# Altium PCB CYT1001AG.PcbDoc
Units mm, origin at the board's own origin, x right, y up, seen from the top; angles counter-clockwise.
Board outline 40 x 40 mm, 2 copper layers (Top Layer, Bottom Layer); 19 components, 1 nets, 55 pads, 0 vias.
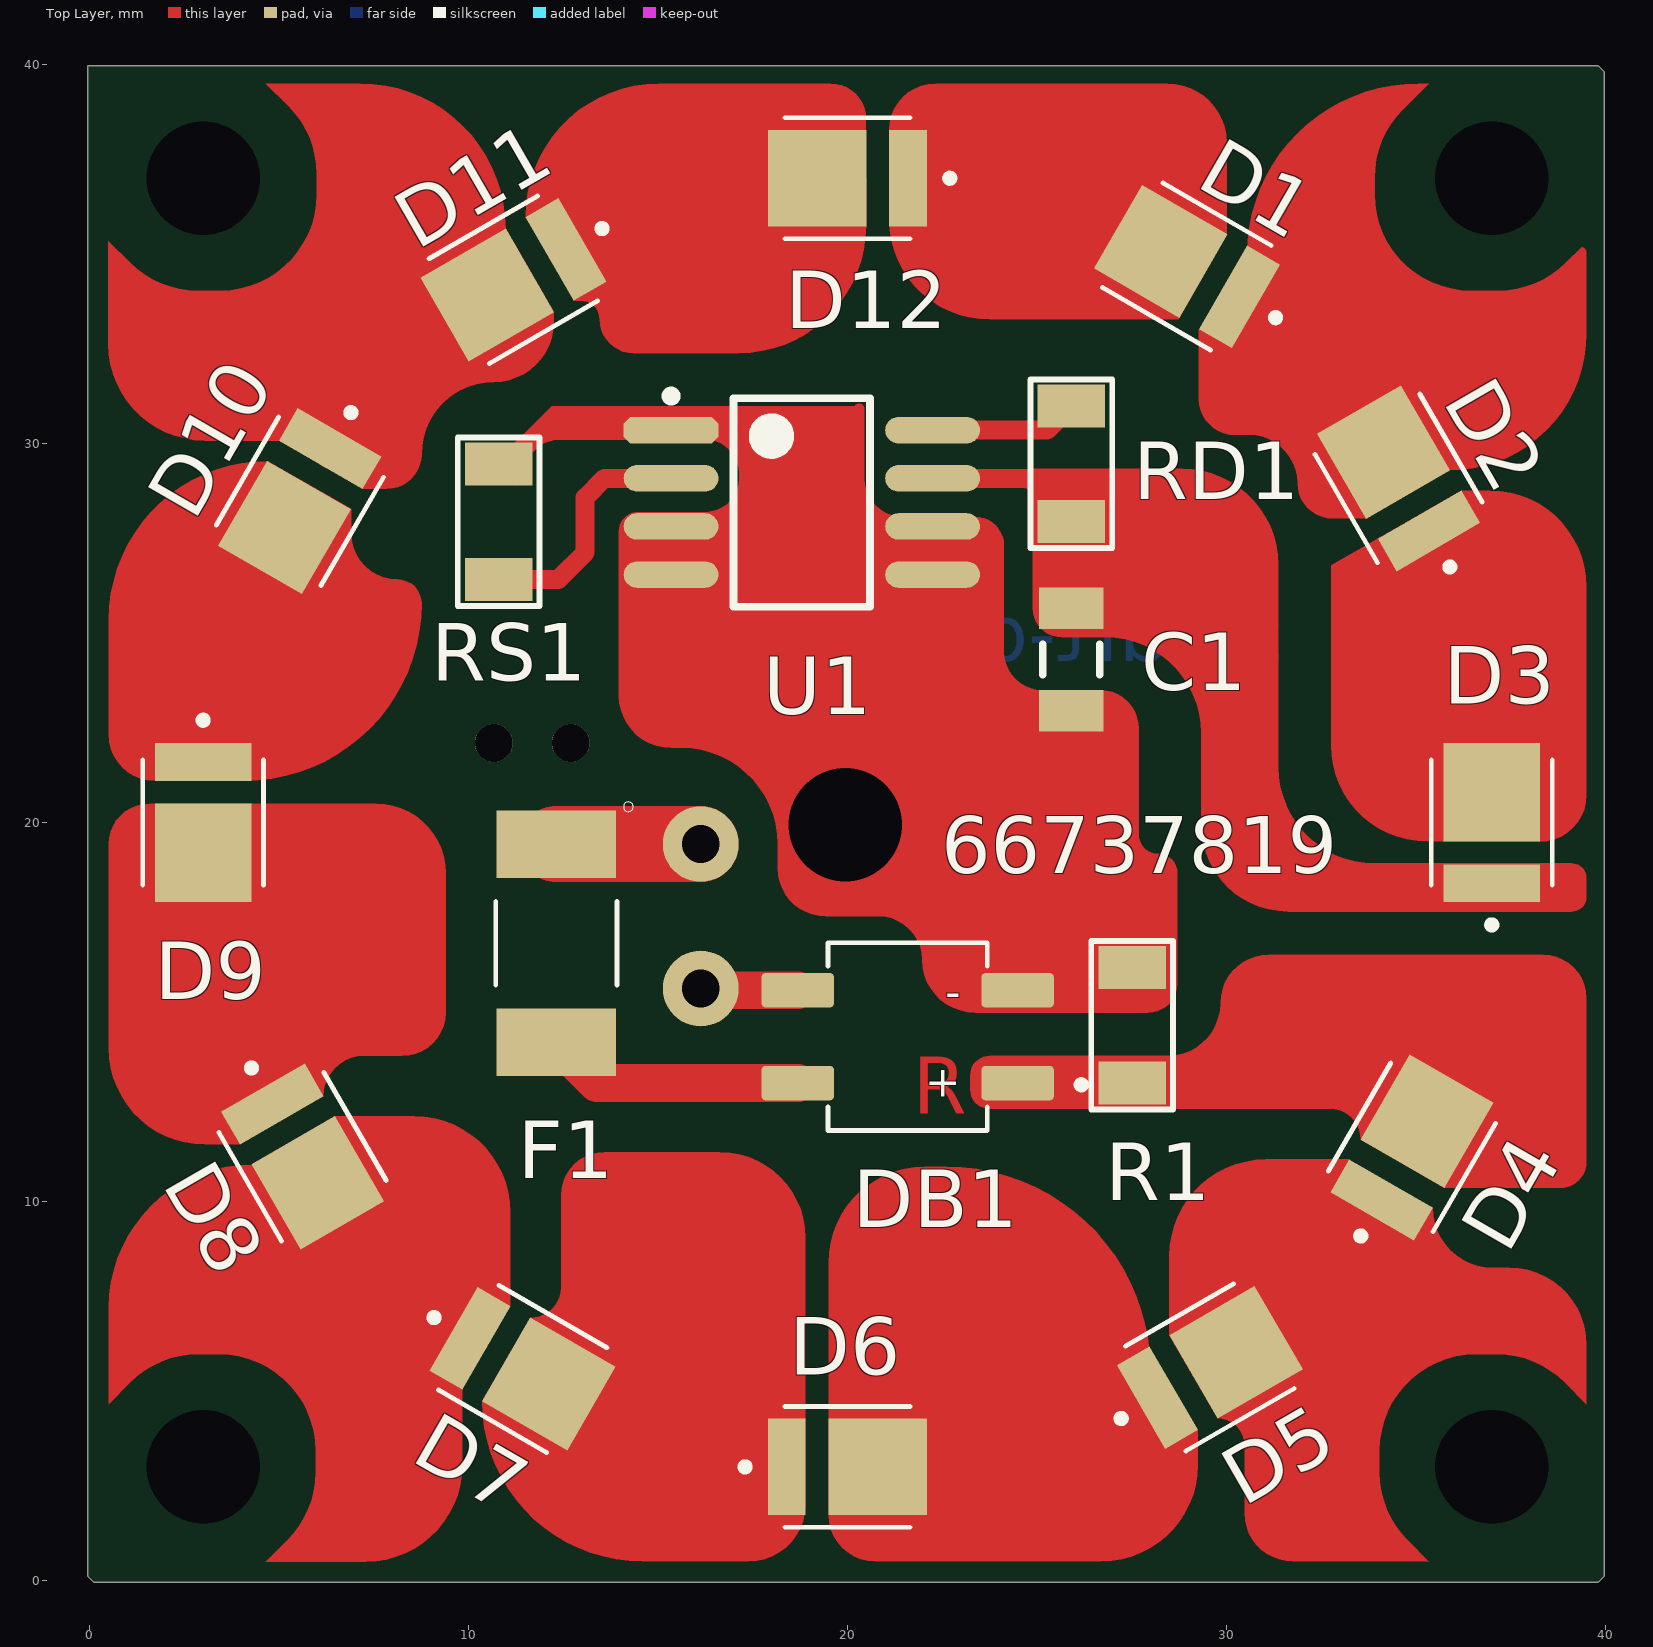
[diagram p0: Top Layer view]
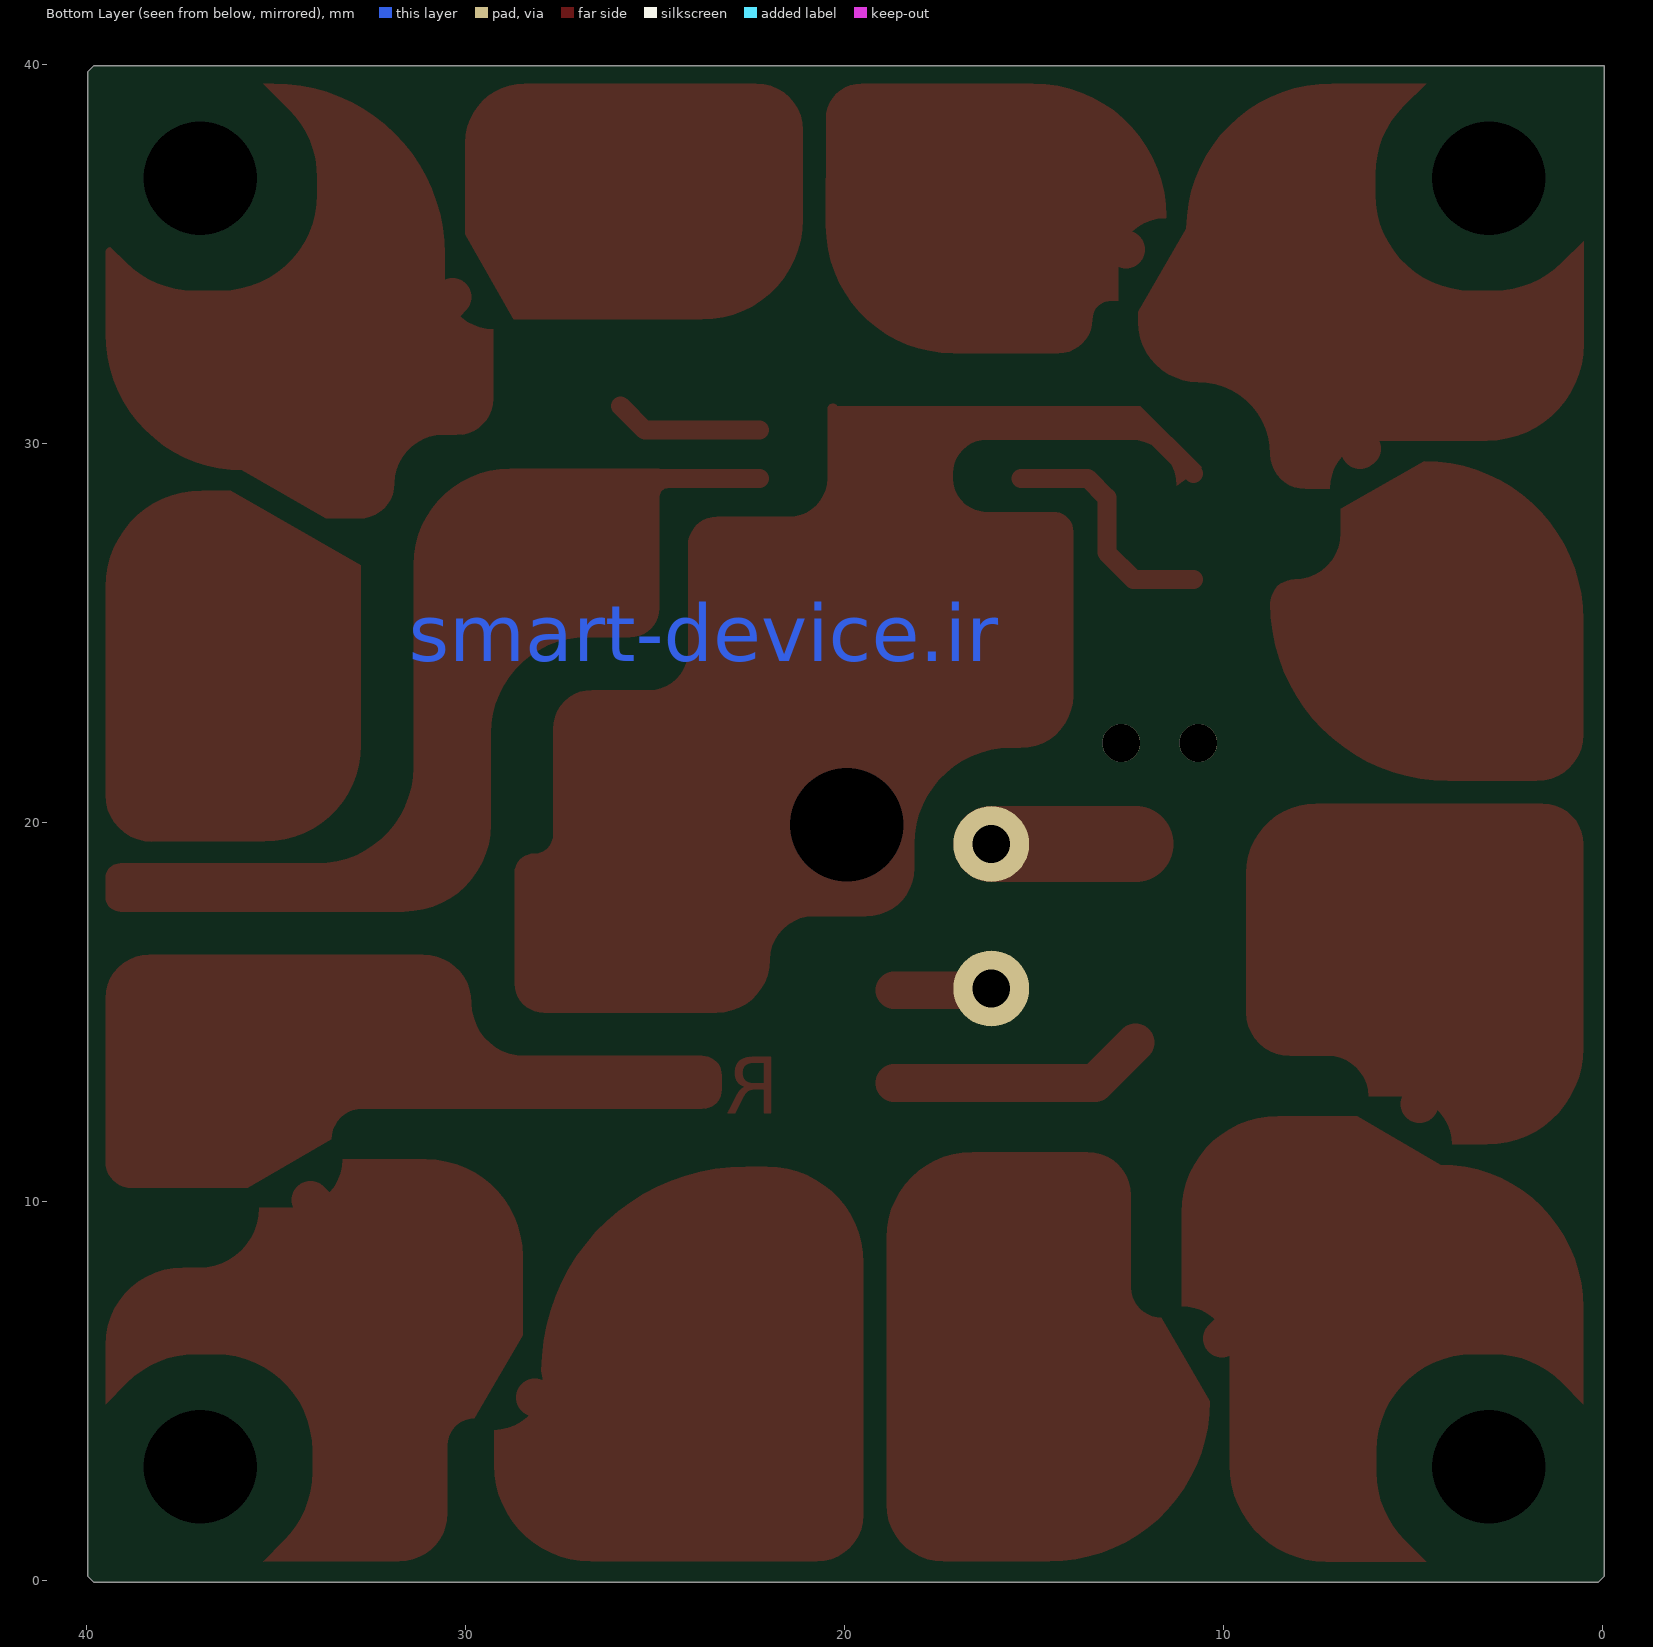
[diagram p1: Bottom Layer view, seen from below]
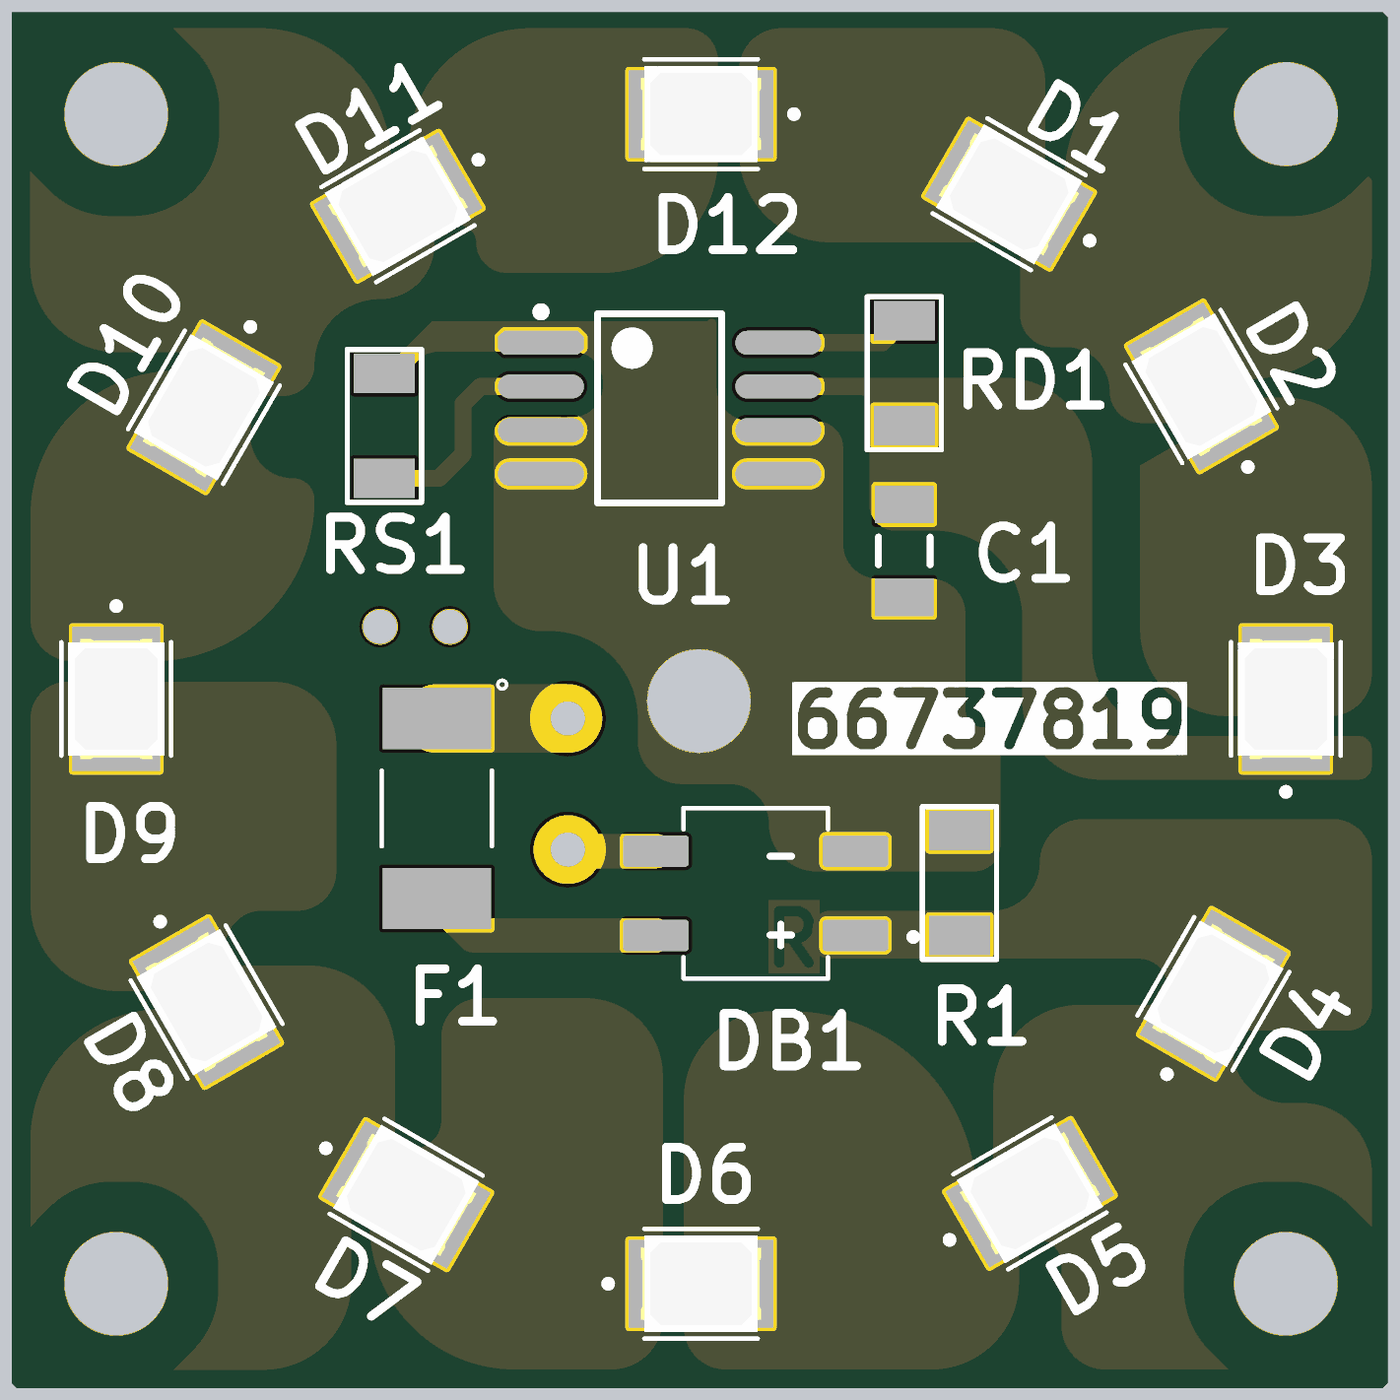
[diagram p2: 3D render of the assembled board from above, using the file's embedded part models]

## Layer stack, top to bottom
Top Solder: solder mask 0.0102, Solder Resist, Dk 3.5
Top Layer: signal copper 0.0356
Dielectric 1: dielectric 0.32, FR-4, Dk 4.8
Bottom Layer: signal copper 0.0356
Bottom Solder: solder mask 0.0102, Solder Resist, Dk 3.5

## Board outline
-0.038,0.111 -0.038,39.962 39.813,39.962 39.962,39.813 39.962,0.111 39.813,-0.038 0.111,-0.038

## Design rules (kind name [scope] priority, off if disabled: settings)
Clearance [All] p1: gap=0.559 ignorepadtopadclearanceinfootprint=FALSE
PolygonConnect [All] p1: connectstyle=Relief reliefconductorwidth=0.254 reliefentries=4 polygonreliefangle="90 Angle" airgapwidth=0.254
RoutingVias [All] p1: holewidth=0.711 width=1.27 viastyle="Through Hole" minholewidth=0.711 minwidth=1.27 maxholewidth=0.711 maxwidth=1.27
SolderMaskExpansion [All] p1: expansion=0.102 istentingtop=FALSE
Width [All] p1: maxlimit=2.54 minlimit=0.254 preferedwidth=0.762
30 further rules are at their usual default settings.

## Components (designator, comment, footprint, x,y, rotation, side; value= is the part's Value field where it differs from the comment)
C1 "10n1kV" C1206 25.908,24.304 r90 top
D1 "18V" LED_OF-SMD2835Y 28.956,34.671 r150 top
D2 "18V" LED_OF-SMD2835Y 34.544,29.083 r120 top
D3 "18V" LED_OF-SMD2835Y 37,20 r90 top
D4 "18V" LED_OF-SMD2835Y 34.893,11.43 r60 top
D5 "18V" LED_OF-SMD2835Y 29.561,5.626 r30 top
D6 "18V" LED_OF-SMD2835Y 20,3 r0 top
D7 "18V" LED_OF-SMD2835Y 11.43,5.588 r330 top
D8 "18V" LED_OF-SMD2835Y 5.626,11.187 r300 top
D9 "18V" LED_OF-SMD2835Y 3,20 r270 top
D10 "18V" LED_OF-SMD2835Y 5.55,28.478 r240 top
D11 "18V" LED_OF-SMD2835Y 11.187,34.322 r210 top
D12 "18V" LED_OF-SMD2835Y 20,37 r180 top
DB1 "MB6S" SOIC245P670X270-4N 21.59,14.351 r180 top
F1 "1A250V" FUSM4632X75 12.319,16.816 r270 top
R1 "510k" 1206_R 27.511,14.65 r90 top
RD1 "750k" 1206_R 25.908,29.467 r270 top
RS1 "1%12" 1206_R 10.795,27.937 r270 top
U1 "CYT1001AG" My_8S2_M 18.796,28.448 r0 top

## Footprints (in the part's own frame and the unit in brackets; to place one, negate y for a bottom-side part, rotate by r counter-clockwise, add the part's x,y. Pads: shape width x height; smd on the part's side, far side on the other; paste and mask are expansions set on the pad)
1206_R [mil]
  rect 45x70 smd: 1(-60,0) 2(60,0)
  silkscreen extent -88,-43 88,43, body extent -71,-28 71,28, height 30
C1206 [mm] "Chip Capacitor, Body 3.2x1.6mm, IPC High Density"
  rect 1.1x1.7 smd: 1(-1.35,0) 2(1.35,0)
  silkscreen extent -0.4,-0.75 0.4,0.75, body extent -1.7,-0.9 1.7,0.9, height 1.3
FUSM4632X75 [mm]
  rect 1.78x3.15 smd: 1(-2.615,0) 2(2.615,0)
  silkscreen extent -3.73,-1.6 1.1,2.03
LED_OF-SMD2835Y [mm]
  rect 2.6x2.55 smd: A(0.8,0)
  rect 1x2.55 smd: C(-1.6,0)
  silkscreen extent -2.8,-1.6 1.65,1.6, body extent -1.75,-1.4 1.75,1.4, height 0.75
My_8S2_M [mm]
  oct 2.5x0.7 smd: 1(-3.45,1.905)
  oval 2.5x0.7 smd: 2(-3.45,0.635) 3(-3.45,-0.635) 4(-3.45,-1.905) 5(3.45,-1.905) 6(3.45,-0.635) 7(3.45,0.635) 8(3.45,1.905)
  silkscreen extent -3.57,-2.75 1.8,2.93, body extent -2.73,-2.75 2.73,2.75, height 2.03
SOIC245P670X270-4N [mm]
  rrect23% 1.91x0.91 smd: 1(-2.9,1.225) 2(-2.9,-1.225) 3(2.9,-1.225) 4(2.9,1.225)
  silkscreen extent -4.68,-2.48 2.1,2.48

## Free pads (board coordinates)
  round 2 hole 1: L(16.129,19.431) N(16.129,15.621)
  round 1.524 hole 3: ""(3,3) ""(3,37) ""(19.939,19.939) ""(37,3) ""(37,37)
  round 1 hole 1: ""(10.668,22.098) ""(12.7,22.098)

## Nets (pads, with @x,y where several pads share a name; then routed paths per layer and width w, separated by ;. In a path a pad name is that pad's centre, name@x,y a point inside that pad or via, vN(x,y) a via of type N, cw(c..) or ccw(c..) an arc to the next point about the centre after c; other vN are vias at no path point)
GND: C1.1 DB1.2 R1.2 RS1.1 U1.1 U1.3 U1.4 U1.5 U1.6 | length 20.6
  Top Layer w0.5: RS1.1@10.795,29.213 11.935,30.353 U1.1 17.653,30.353 18.796,29.21 18.796,25.908 21.75,22.954 C1.1
pads on no net: C1.2 D1.A D1.C D2.A D2.C D3.A D3.C D4.A D4.C D5.A D5.C D6.A D6.C D7.A D7.C D8.A D8.C D9.A D9.C D10.A D10.C D11.A D11.C D12.A D12.C DB1.1 DB1.3 DB1.4 F1.1 F1.2 R1.1 RD1.1 RD1.2 RS1.2 U1.2 U1.7 U1.8
copper on no net: | length 132.4
  Top Layer w0.5: 10.795,26.413 12.371,26.413 13.081,27.123 13.081,28.575 13.589,29.083 15.346,29.083 ; 22.246,29.083 25.016,29.083 25.908,28.191 ; 22.246,30.353 25.27,30.353 25.908,30.991
  Top Layer w1: 3,19.2 3.235,18.4 3.235,18.348 3.433,17.628 4.826,12.573 ; 3,21.6 3.038,21.6 3.038,21.71 4.557,26.079 5.149,27.783 5.15,27.785 ; 6.026,10.495 6.604,9.904 8.856,7.603 10.044,6.388 ; 6.351,29.865 6.35,29.864 6.405,29.832 6.519,30.029 6.94,30.442 10.493,33.92 ; 9.904,33.344 10.495,33.922 ; 12.123,5.188 12.892,4.92 18.4,3 ; 12.319,14.201 13.394,13.126 18.69,13.126 ; 12.573,35.122 cw(c12.846,34.16) 12.575,35.122 18.349,36.759 18.4,36.759 19.2,37 ; 16.129,15.621 16.174,15.576 18.69,15.576 ; 20.8,3 21.6,3.211 21.652,3.211 21.754,3.236 28.175,4.826 ; 21.6,37 21.603,36.999 27.472,35.3 28.263,35.071 ; 24.49,13.126 27.511,13.126 34.29,13.126 35.293,12.123 ; 30.254,6.026 30.802,6.676 30.964,6.769 34.093,10.044 ; 30.342,33.871 30.343,33.87 ; 30.344,33.869 30.65,33.539 33.586,30.377 34.144,29.776 ; 30.353,20.32 32.273,18.4 37,18.4 ; 35.344,27.697 35.345,27.695 36.794,21.656 36.794,21.6 37,20.8
  Top Layer w1.5: 25.908,25.654 25.908,28.191
  Top Layer w2: 12.319,19.431 16.129,19.431 ; 25.908,28.191 28.578,28.191 30.353,26.416 30.353,20.32

## Other copper
Top Layer:
  region: 30.005,35.518 30.005,37.94 ccw(c28.448,37.94) 28.448,39.497 22.327,39.497 ccw(c22.327,38.272) 21.102,38.272 21.102,35.921 ccw(c23.749,35.921) 23.749,33.274 28.702,33.274 ccw(c28.702,33.323) 28.75,33.323
  region: 24.892,29.337 28.829,29.337 cw(c28.829,26.797) 31.369,26.797 31.369,21.463 ccw(c33.909,21.463) 33.909,18.923 39.116,18.923 cw(c39.116,18.542) 39.497,18.542 39.497,18.034 cw(c39.116,18.034) 39.116,17.653 31.623,17.653 cw(c31.623,19.939) 29.337,19.939 29.337,22.352 ccw(c26.797,22.352) 26.797,24.892 25.654,24.892 cw(c25.654,25.654) 24.892,25.654 24.892,28.575 ccw(c24.638,28.575) 24.638,28.829 24.13,28.829
  region: 29.767,4.281 cw(c29.767,3.568) 30.48,3.568 30.48,1.778 ccw(c31.75,1.778) 31.75,0.508 35.342,0.508 35.342,0.5 34.78,1.062 cw(c36.576,2.858) 34.036,2.858 34.036,3.429 cw(c36.576,3.429) 36.576,5.969 37.137,5.969 cw(c37.137,3.429) 38.933,5.225 39.5,4.658 39.5,6.22 ccw(c37.465,6.22) 37.465,8.255 37.027,8.255 cw(c37.027,9.839) 35.443,9.839 34.513,9.839 cw(c34.513,11.111) 33.241,11.111 31.036,11.111 ccw(c31.036,8.571) 28.496,8.571 28.496,6.478
  region: 19.505,1.727 ccw(c20.724,1.727) 20.724,0.508 26.703,0.508 ccw(c26.703,3.048) 29.243,3.048 29.243,3.972 cw(c29.243,5.249) 27.998,5.53 ccw(c22.606,5.53) 22.606,10.922 22.042,10.922 ccw(c22.042,8.382) 19.502,8.382 19.502,4.275
  region: 11.639,6.932 ccw(c11.639,7.739) 12.446,7.739 12.446,10.16 cw(c13.589,10.16) 13.589,11.303 16.637,11.303 cw(c16.637,9.05) 18.89,9.05 18.89,1.999 cw(c17.399,1.999) 17.399,0.508 14.589,0.508 cw(c14.589,4.732) 10.366,4.732
  region: 4.281,10.977 ccw(c4.281,7.204) 0.508,7.204 0.508,4.658 1.067,5.225 cw(c2.863,3.429) 2.863,5.969 3.429,5.969 cw(c3.429,3.429) 5.969,3.429 5.969,2.863 cw(c3.429,2.863) 5.225,1.067 4.658,0.5 7.297,0.5 ccw(c7.297,3.04) 9.837,3.04 9.837,5.974 cw(c11.106,5.974) 11.106,7.243 11.106,9.714 ccw(c8.566,9.714) 8.566,12.254 6.477,12.254
  region: 1.727,20.498 1.575,20.498 ccw(c1.575,19.431) 0.508,19.431 0.508,14.047 ccw(c3.048,14.047) 3.048,11.507 3.972,11.507 cw(c5.246,11.507) 5.246,12.78 6.176,12.78 cw(c7.238,12.78) 7.238,13.843 8.255,13.843 ccw(c8.255,14.986) 9.398,14.986 9.398,18.669 ccw(c7.569,18.669) 7.569,20.498 4.273,20.498
  region: 4.7,29.536 ccw(c4.7,25.344) 0.508,25.344 0.508,22.323 ccw(c1.731,22.323) 1.731,21.1 4.082,21.1 ccw(c4.082,25.781) 8.763,25.781 ccw(c8.128,25.781) 8.128,26.416 cw(c8.128,27.642) 6.902,27.642 6.902,28.274
  region: 10.979,35.664 ccw(c7.143,35.664) 7.143,39.5 4.658,39.5 5.256,38.902 cw(c3.46,37.106) 6,37.106 6,36.576 cw(c3.46,36.576) 3.46,34.036 2.858,34.036 cw(c2.858,36.576) 1.062,34.78 0.5,35.342 0.5,32.619 ccw(c3.04,32.619) 3.04,30.079 5.928,30.079 cw(c5.928,28.806) 7.201,28.806 7.851,28.806 ccw(c7.851,29.718) 8.763,29.718 cw(c10.668,29.718) 10.668,31.623 ccw(c10.668,33.204) 12.249,33.204 12.249,33.475
  region: 20.489,38.265 20.489,38.566 ccw(c19.558,38.566) 19.558,39.497 15.018,39.497 ccw(c15.018,35.988) 11.51,35.988 ccw(c11.557,35.988) 11.557,35.941 cw(c11.557,34.719) 12.779,34.719 12.779,33.767 12.969,33.767 cw(c12.969,33.274) 13.462,33.274 ccw(c14.351,33.274) 14.351,32.385 17.134,32.385 ccw(c17.134,35.741) 20.49,35.741
  region: 35.886,29.292 ccw(c35.886,32.903) 39.497,32.903 39.497,35.052 ccw(c39.37,35.052) 39.37,35.179 38.971,34.78 cw(c37.175,36.576) 37.175,34.036 36.449,34.036 cw(c36.449,36.576) 33.909,36.576 33.909,37.015 cw(c36.449,37.015) 34.653,38.811 35.342,39.5 35.055,39.5 ccw(c35.055,34.992) 30.547,34.992 30.547,34.288 cw(c29.275,34.288) 29.275,33.016 29.275,31.177 ccw(c30.226,31.177) 30.226,30.226 30.607,30.226 cw(c30.607,28.956) 31.877,28.956 ccw(c32.81,28.956) 32.81,28.023 33.691,28.023
  region: 38.273,19.498 ccw(c38.273,20.722) 39.497,20.722 39.497,26.22 ccw(c36.957,26.22) 36.957,28.76 36.2,28.76 32.761,26.79 32.761,22.041 ccw(c35.301,22.041) 35.301,19.501 38.271,19.501
  region: 35.745,10.362 38.81,10.362 ccw(c38.81,11.049) 39.497,11.049 39.497,15.367 ccw(c38.354,15.367) 38.354,16.51 31.115,16.51 ccw(c31.115,15.24) 29.845,15.24 cw(c28.448,15.24) 28.448,13.843 23.749,13.843 ccw(c23.749,13.335) 23.241,13.335 23.241,12.954 ccw(c23.749,12.954) 23.749,12.446 32.738,12.446 cw(c32.738,11.64) 33.544,11.64
  region net GND: 10.577,29.373 12.192,30.988 20.193,30.988 cw(c20.309,30.914) 20.447,30.914 20.447,29.083 ccw(c21.463,29.083) 21.463,28.067 23.368,28.067 cw(c23.368,27.305) 24.13,27.305 24.13,24.511 ccw(c25.146,24.511) 25.146,23.495 26.67,23.495 cw(c26.67,22.479) 27.686,22.479 27.686,19.685 ccw(c28.194,19.685) 28.194,19.177 cw(c28.194,18.669) 28.702,18.669 28.702,15.748 cw(c27.94,15.748) 27.94,14.986 23.368,14.986 cw(c23.368,16.383) 21.971,16.383 ccw(c20.828,16.383) 20.828,17.526 19.431,17.526 cw(c19.431,18.796) 18.161,18.796 18.161,19.431 ccw(c15.621,19.431) 15.621,21.971 15.346,21.971 cw(c15.346,23.347) 13.97,23.347 13.97,27.686 cw(c14.478,27.686) 14.478,28.194 16.256,28.194 ccw(c16.256,29.083) 17.145,29.083 17.145,29.21 ccw(c16.256,29.21) 16.256,30.099 12.446,30.099 ccw(c12.446,28.883) 11.23,28.883
  text "R" at 21.717,12.319 h1.5
Bottom Layer:
  text "smart-device.ir" at 31.496,24.257 h1.5

## Silkscreen, mask and mechanical layers (free items; w line width, h text height)
Top Overlay:
  text "66737819" at 22.479,18.669 h1.5

## Text inside footprints (layer, text, board x,y; h text height)
DB1: Top Overlay "+" at 22.989,13.461 h0.81 r180; Top Overlay "-" at 22.99,15.751 h0.81 r180